# Altium PCB 606-100861-r02.pcbdoc (part 2 of 3)
Units mm, origin at the board's own origin, x right, y up, seen from the top; angles counter-clockwise.
Board outline 64 x 17.5 mm, 4 copper layers (Top Layer, Ground, Power, Bottom Layer), stack 1.551 mm thick; 99 components, 69 nets, 422 pads, 178 vias.
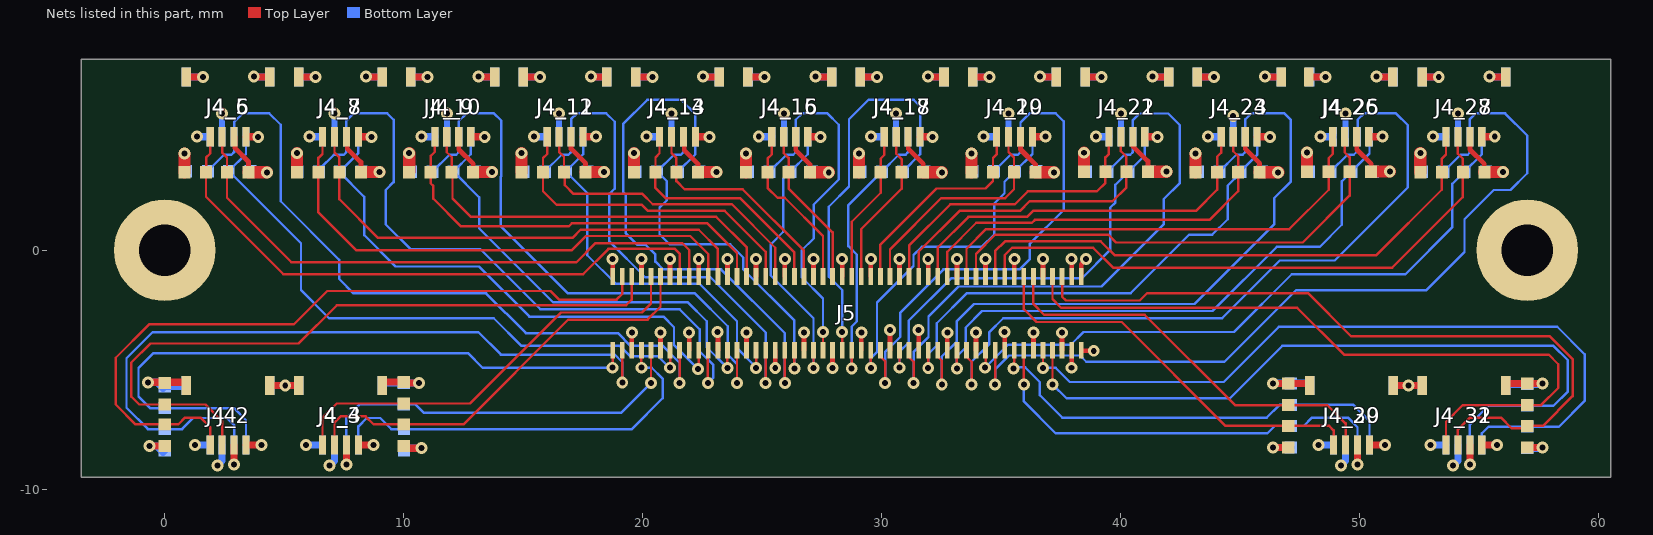
[diagram p4: the nets of this part, all layers, seen from the top]

## Part data
J4 J4_2 J4_3 J4_4 J4_5 J4_6 J4_7 J4_8 J4_9 J4_10 J4_11 J4_12 J4_13 J4_14 J4_15 J4_16 J4_17 J4_18 J4_19 J4_20 J4_21 J4_22 J4_23 J4_24 J4_25 J4_26 J4_27 J4_28 J4_29 J4_30 J4_31 J4_32: "CONN FFC FPC 4POS 0.50MM R/A"
J5: library part DF40HC(3.0)-100DS-0.4V(51), "CONN RCPT 100POS 0.4MM SMD GOLD 3.0MM"
M1 M2: "MTG, 4.25mm PAD, 2.15mm Plated Hole"
R1_1 R1_2 R1_3 R1_4 R1_5 R1_6 R1_7 R1_8 R1_9 R1_10 R1_11 R1_12 R1_13 R1_14 R1_15 R1_16 R1_17 R1_18 R1_19 R1_20 R1_21 R1_22 R1_23 R1_24 R1_25 R1_26 R1_27 R1_28 R1_29 R1_30 R1_31 R1_32 R2_1 R2_2 R2_3 R2_4 R2_5 R2_6 R2_7 R2_8 R2_9 R2_10 R2_11 R2_12 R2_13 R2_14 R2_15 R2_16 R2_17 R2_18 R2_19 R2_20 R2_21 R2_22 R2_23 R2_24 R2_25 R2_26 R2_27 R2_28 R2_29 R2_30 R2_31 R2_32: library part RC0402JR-0710KL, "RES 10.0K OHM 1/16W 5% 0402 SMD"

## Via types
v1: diameter 0.5, hole 0.25, Top Layer to Bottom Layer, tented both sides, 178 vias

## Nets (pads, with @x,y where several pads share a name; then routed paths per layer and width w, separated by ;. In a path a pad name is that pad's centre, name@x,y a point inside that pad or via, vN(x,y) a via of type N, cw(c..) or ccw(c..) an arc to the next point about the centre after c; other vN are vias at no path point)
GND: J4.3 J4.5 J4.6 J4_2.3 J4_2.5 J4_2.6 J4_3.3 J4_3.5 J4_3.6 J4_4.3 J4_4.5 J4_4.6 J4_5.3 J4_5.5 J4_5.6 J4_6.3 J4_6.5 J4_6.6 J4_7.3 J4_7.5 J4_7.6 J4_8.3 J4_8.5 J4_8.6 J4_9.3 J4_9.5 J4_9.6 J4_10.3 J4_10.5 J4_10.6 J4_11.3 J4_11.5 J4_11.6 J4_12.3 J4_12.5 J4_12.6 J4_13.3 J4_13.5 J4_13.6 J4_14.3 J4_14.5 J4_14.6 J4_15.3 J4_15.5 J4_15.6 J4_16.3 J4_16.5 J4_16.6 J4_17.3 J4_17.5 J4_17.6 J4_18.3 J4_18.5 J4_18.6 J4_19.3 J4_19.5 J4_19.6 J4_20.3 J4_20.5 J4_20.6 J4_21.3 J4_21.5 J4_21.6 J4_22.3 J4_22.5 J4_22.6 J4_23.3 J4_23.5 J4_23.6 J4_24.3 J4_24.5 J4_24.6 J4_25.3 J4_25.5 J4_25.6 J4_26.3 J4_26.5 J4_26.6 J4_27.3 J4_27.5 J4_27.6 J4_28.3 J4_28.5 J4_28.6 J4_29.3 J4_29.5 J4_29.6 J4_30.3 J4_30.5 J4_30.6 J4_31.3 J4_31.5 J4_31.6 J4_32.3 J4_32.5 J4_32.6 J5.5 J5.11 J5.17 J5.23 J5.29 J5.35 J5.41 J5.47 J5.53 J5.59 J5.65 J5.71 J5.77 J5.83 J5.89 J5.95 J5.97 J5.98 J5.99 J5.100 M1.1 M2.1 R1_1.1 R1_2.1 R1_3.1 R1_4.1 R1_5.1 R1_6.1 R1_7.1 R1_8.1 R1_9.1 R1_10.1 R1_11.1 R1_12.1 R1_13.1 R1_14.1 R1_15.1 R1_16.1 R1_17.1 R1_18.1 R1_19.1 R1_20.1 R1_21.1 R1_22.1 R1_23.1 R1_24.1 R1_25.1 R1_26.1 R1_27.1 R1_28.1 R1_29.1 R1_30.1 R1_31.1 R1_32.1 R2_1.1 R2_2.1 R2_3.1 R2_4.1 R2_5.1 R2_6.1 R2_7.1 R2_8.1 R2_9.1 R2_10.1 R2_11.1 R2_12.1 R2_13.1 R2_14.1 R2_15.1 R2_16.1 R2_17.1 R2_18.1 R2_19.1 R2_20.1 R2_21.1 R2_22.1 R2_23.1 R2_24.1 R2_25.1 R2_26.1 R2_27.1 R2_28.1 R2_29.1 R2_30.1 R2_31.1 R2_32.1 | length 147.7
  Top Layer w0.1: v1(23.115,-3.42) v1@23.14,-3.445 ; J5.99@38.34,-4.18 J5.99@38.362,-4.202
  Top Layer w0.2: J4_6.3@2.936,4.75 2.936,4.282 3.504,3.715 R1_6.1@3.504,3.265 ; J4_8.3@7.636,4.75 7.636,4.257 8.204,3.689 R1_8.1@8.204,3.269 ; J4_10.3@12.3,4.75 12.3,4.218 12.904,3.614 R1_10.1@12.904,3.269 ; J4_12.3@17,4.75 17,4.243 17.604,3.639 R1_12.1@17.604,3.269 ; J5.5@19.54,-4.18 v1(19.54,-3.44) ; J5.11@20.74,-4.18 20.736,-4.176 20.74,-4.172 v1(20.74,-3.44) ; J4_14.3@21.736,4.75 21.736,4.182 22.304,3.614 R1_14.1@22.304,3.269 ; J5.17@21.94,-4.18 v1(21.94,-3.44) ; J5.23@23.14,-4.18 v1@23.14,-3.445 ; J5.29@24.34,-4.18 v1(24.34,-3.44) ; v1(25.54,-4.92) J5.35@25.54,-4.18 ; J4_16.3@26.397,4.75 26.397,4.193 27,3.59 R1_16.1@27,3.265 ; J5.41@26.74,-4.18 v1(26.74,-3.44) ; v1(27.94,-4.92) J5.47@27.94,-4.18 ; J5.53@29.14,-4.18 v1(29.14,-3.44) ; J5.59@30.34,-4.18 v1(30.34,-3.335) ; J4_18.3@31.1,4.75 31.1,4.243 31.729,3.615 R1_18.1@31.729,3.265 ; J5.65@31.54,-4.18 v1(31.54,-3.335) ; J5.71@32.74,-4.18 v1(32.74,-3.448) ; J5.77@33.94,-4.18 v1(33.94,-3.44) ; J5.83@35.14,-4.18 v1(35.14,-3.42) ; J4_20.3@35.8,4.75 35.8,4.218 36.429,3.59 R1_20.1@36.429,3.265 ; J5.89@36.34,-4.18 v1(36.34,-3.44) ; J5.95@37.54,-4.18 v1(37.54,-3.448) ; v1(37.94,-4.912) J5.97@37.94,-4.18 ; J5.98@37.94,-1.1 v1(37.94,-0.368) ; J5.100@38.34,-1.1 38.34,-0.59 38.54,-0.39 v1(38.54,-0.368) ; J5.99@38.362,-4.202 v1(38.865,-4.202) ; J4_22.3@40.5,4.75 40.5,4.361 41.129,3.733 R1_22.1@41.129,3.29 ; J4_24.3@45.2,4.75 45.2,4.243 45.804,3.64 R1_24.1@45.804,3.265 ; J4_26.3@49.866,4.75 49.866,4.218 50.47,3.614 R1_26.1@50.47,3.294 ; J4_28.3@54.6,4.75 54.6,4.218 55.204,3.614 R1_28.1@55.204,3.269
  Top Layer w0.3: v1(-0.7,-5.522) 0.772,-5.522 J4_2.5@0.9,-5.65 ; v1(-0.641,-8.184) -0.266,-8.184 ; J4_6.5@0.9,7.25 v1(1.598,7.25) ; v1(2.9,-8.953) J4_2.3@2.9,-8.15 ; v1(3.724,7.276) 3.75,7.25 J4_6.6@4.4,7.25 ; J4_2.6@4.4,-5.65 v1(5.041,-5.65) J4_4.5@5.6,-5.65 ; J4_8.5@5.6,7.25 v1(6.298,7.25) ; v1(7.6,-8.953) J4_4.3@7.6,-8.15 ; v1(8.424,7.276) 8.45,7.25 J4_8.6@9.1,7.25 ; J4_4.6@9.1,-5.65 9.244,-5.506 R2_4.1@9.997,-5.506 10.038,-5.547 v1(10.638,-5.547) ; R1_4.1@9.997,-8.184 10.091,-8.278 v1(10.75,-8.278) ; J4_10.5@10.3,7.25 v1(10.998,7.25) ; v1(13.124,7.276) 13.15,7.25 J4_10.6@13.8,7.25 ; J4_12.5@15,7.25 v1(15.698,7.25) ; v1(17.824,7.276) 17.85,7.25 J4_12.6@18.5,7.25 ; J4_14.5@19.7,7.25 v1(20.398,7.25) ; v1(22.524,7.276) 22.55,7.25 J4_14.6@23.2,7.25 ; J4_16.5@24.397,7.25 v1(25.095,7.25) ; v1(27.221,7.276) 27.247,7.25 J4_16.6@27.897,7.25 ; J4_18.5@29.1,7.25 v1(29.798,7.25) ; v1(31.924,7.276) 31.95,7.25 J4_18.6@32.6,7.25 ; J4_20.5@33.8,7.25 v1(34.498,7.25) ; v1(36.624,7.276) 36.65,7.25 J4_20.6@37.3,7.25 ; J4_22.5@38.5,7.25 v1(39.198,7.25) ; v1(41.324,7.276) 41.35,7.25 J4_22.6@42,7.25 ; J4_24.5@43.2,7.25 v1(43.898,7.25) ; v1(46.024,7.276) 46.05,7.25 J4_24.6@46.7,7.25 ; v1(46.359,-8.247) R2_30.1@47,-8.247 ; v1(46.359,-5.578) R1_30.1@47,-5.578 47.828,-5.578 J4_30.5@47.9,-5.65 ; J4_26.5@47.866,7.25 v1(48.564,7.25) ; v1(49.9,-8.953) J4_30.3@49.9,-8.15 ; v1(50.69,7.276) 50.717,7.25 J4_26.6@51.366,7.25 ; J4_30.6@51.4,-5.65 v1(52.041,-5.65) J4_32.5@52.6,-5.65 ; J4_28.5@52.6,7.25 v1(53.298,7.25) ; v1(54.6,-8.953) J4_32.3@54.6,-8.15 ; v1(55.424,7.276) 55.45,7.25 J4_28.6@56.1,7.25 ; J4_32.6@56.102,-5.721 56.246,-5.578 R2_32.1@57,-5.578 v1(57.641,-5.578) ; R1_32.1@57,-8.247 v1(57.641,-8.247)
  Top Layer w0.508: R2_6.1@0.826,3.265 v1(0.826,4.057) ; R1_6.1@3.504,3.265 v1(4.282,3.265) ; R2_8.1@5.526,3.269 v1(5.526,4.061) ; R1_8.1@8.204,3.269 v1(8.982,3.269) ; R2_10.1@10.226,3.269 v1(10.226,4.061) ; R1_10.1@12.904,3.269 v1(13.682,3.269) ; R2_12.1@14.926,3.269 v1(14.926,4.061) ; R1_12.1@17.604,3.269 v1(18.382,3.269) ; R2_14.1@19.626,3.269 v1(19.626,4.061) ; R1_14.1@22.304,3.269 v1(23.082,3.269) ; R2_16.1@24.322,3.265 v1(24.322,4.057) ; R1_16.1@27,3.265 v1(27.778,3.265) ; R2_18.1@29.051,3.265 v1(29.051,4.057) ; R1_18.1@31.729,3.265 v1(32.507,3.265) ; R2_20.1@33.751,3.265 v1(33.751,4.057) ; R1_20.1@36.429,3.265 v1(37.207,3.265) ; R2_22.1@38.451,3.29 v1(38.451,4.082) ; R1_22.1@41.129,3.29 v1(41.907,3.29) ; R2_24.1@43.126,3.265 v1(43.126,4.057) ; R1_24.1@45.804,3.265 v1(46.582,3.265) ; R2_26.1@47.792,3.294 v1(47.792,4.086) ; R1_26.1@50.47,3.294 v1(51.248,3.294) ; R2_28.1@52.526,3.269 v1(52.526,4.061) ; R1_28.1@55.204,3.269 v1(55.982,3.269)
  Bottom Layer w0.1: R1_1.1@-0.072,-8.45 R1_1.1@0,-8.378 ; R2_1.1@-0.072,-5.772 R2_1.1@0,-5.7 ; J4.6@0.85,-5.7 J4.6@0.9,-5.65 ; J4_3.5@9.15,-5.7 J4_3.5@9.1,-5.65 J4_3.5@9.2,-5.55 ; R1_3.1@10,-5.55 R1_3.1@10.003,-5.547 ; R2_3.1@10.008,-8.378 R2_3.1@10.108,-8.278 ; v1(46.359,-8.247) 46.362,-8.25 v1@46.364,-8.252 ; v1(46.359,-5.578) v1@46.372,-5.564 ; J4_29.6@47.814,-5.564 J4_29.6@47.9,-5.65 ; J4_31.5@56.1,-5.65 J4_31.5@56.149,-5.6 ; v1@57.61,-8.278 v1(57.641,-8.247) ; v1@57.618,-5.6 v1(57.641,-5.578)
  Bottom Layer w0.254: J4_5.3@2.4,4.75 v1(2.4,5.722) ; J4_7.3@7.1,4.75 v1(7.1,5.722) ; J4_9.3@11.8,4.75 v1(11.8,5.722) ; J4_11.3@16.5,4.75 v1(16.5,5.722) ; J4_13.3@21.2,4.75 v1(21.2,5.722) ; J4_15.3@25.9,4.75 v1(25.9,5.722) ; J4_17.3@30.6,4.75 v1(30.6,5.722) ; J4_19.3@35.3,4.75 v1(35.3,5.722) ; J4_21.3@40,4.75 v1(40,5.722) ; J4_23.3@44.7,4.644 v1(44.7,5.616) ; J4_25.3@49.4,4.75 v1(49.4,5.722) ; J4_27.3@54.1,4.75 v1(54.1,5.722)
  Bottom Layer w0.3: v1(-0.7,-5.522) -0.322,-5.522 R2_1.1@-0.072,-5.772 ; v1(-0.641,-8.184) -0.338,-8.184 R1_1.1@-0.072,-8.45 ; R1_1.1@-0.061,-8.316 R1_1.1@0,-8.378 ; R2_1.1@0,-5.7 J4.6@0.85,-5.7 ; v1(0.826,4.057) 0.9,3.983 R1_5.1@0.9,3.315 ; J4_5.6@0.9,7.25 v1(1.598,7.25) ; v1(2.2,-9) 2.4,-8.8 J4.3@2.4,-8.15 ; R2_5.1@3.578,3.315 3.628,3.265 v1(4.282,3.265) ; v1(3.724,7.276) 3.75,7.25 J4_5.5@4.4,7.25 ; J4.5@4.4,-5.65 v1(5.041,-5.65) J4_3.6@5.6,-5.65 ; v1(5.526,4.061) 5.526,3.318 R1_7.1@5.55,3.294 ; J4_7.6@5.6,7.25 v1(6.298,7.25) ; v1(6.9,-9) 7.1,-8.8 J4_3.3@7.1,-8.15 ; R2_7.1@8.228,3.294 8.253,3.269 v1(8.982,3.269) ; v1(8.424,7.276) 8.45,7.25 J4_7.5@9.1,7.25 ; J4_3.5@9.2,-5.55 R1_3.1@10,-5.55 ; R1_3.1@10.003,-5.547 v1(10.638,-5.547) ; R2_3.1@10.108,-8.278 v1(10.75,-8.278) ; v1(10.226,4.061) 10.226,3.368 R1_9.1@10.3,3.294 ; J4_9.6@10.3,7.25 v1(10.998,7.25) ; R2_9.1@12.978,3.294 13.003,3.269 v1(13.682,3.269) ; v1(13.124,7.276) 13.15,7.25 J4_9.5@13.8,7.25 ; v1(14.926,4.061) 14.926,3.368 R1_11.1@15,3.294 ; J4_11.6@15,7.25 v1(15.698,7.25) ; R2_11.1@17.678,3.294 17.703,3.269 v1(18.382,3.269) ; v1(17.824,7.276) 17.85,7.25 J4_11.5@18.5,7.25 ; v1(19.626,4.061) 19.626,3.368 R1_13.1@19.7,3.294 ; J4_13.6@19.7,7.25 v1(20.398,7.25) ; R2_13.1@22.378,3.294 22.403,3.269 v1(23.082,3.269) ; v1(22.524,7.276) 22.55,7.25 J4_13.5@23.2,7.25 ; v1(24.322,4.057) 24.322,3.372 R1_15.1@24.4,3.294 ; J4_15.6@24.4,7.25 v1(25.095,7.25) ; R2_15.1@27.078,3.294 27.108,3.265 v1(27.778,3.265) ; v1(27.221,7.276) 27.247,7.25 J4_15.5@27.9,7.25 ; v1(29.051,4.057) 29.051,3.343 R1_17.1@29.1,3.294 ; J4_17.6@29.1,7.25 v1(29.798,7.25) ; R2_17.1@31.778,3.294 31.808,3.265 v1(32.507,3.265) ; v1(31.924,7.276) 31.95,7.25 J4_17.5@32.6,7.25 ; v1(33.751,4.057) 33.751,3.364 R1_19.1@33.8,3.315 ; J4_19.6@33.8,7.25 v1(34.498,7.25) ; R2_19.1@36.478,3.315 36.528,3.265 v1(37.207,3.265) ; v1(36.624,7.276) 36.65,7.25 J4_19.5@37.3,7.25 ; v1(38.451,4.082) 38.451,3.393 R1_21.1@38.55,3.294 ; J4_21.6@38.5,7.25 v1(39.198,7.25) ; R2_21.1@41.228,3.294 41.232,3.29 v1(41.907,3.29) ; v1(41.324,7.276) 41.35,7.25 J4_21.5@42,7.25 ; v1(43.126,4.057) 43.126,3.39 R1_23.1@43.222,3.294 ; J4_23.6@43.2,7.25 v1(43.898,7.25) ; R2_23.1@45.9,3.294 45.929,3.265 v1(46.582,3.265) ; v1(46.024,7.276) 46.05,7.25 J4_23.5@46.7,7.25 ; v1@46.362,-8.25 R1_29.1@47.105,-8.25 ; v1@46.372,-5.564 R2_29.1@47.105,-5.564 J4_29.6@47.814,-5.564 ; v1(47.792,4.086) 47.792,3.374 R1_25.1@47.872,3.294 ; J4_25.6@47.9,7.25 v1(48.564,7.25) ; v1(49.2,-9) 49.4,-8.8 J4_29.3@49.4,-8.15 ; R2_25.1@50.55,3.294 v1(51.248,3.294) ; v1(50.69,7.276) 50.717,7.25 J4_25.5@51.366,7.25 ; J4_29.5@51.4,-5.65 v1(52.041,-5.65) J4_31.6@52.6,-5.65 ; v1(52.526,4.061) 52.526,3.372 R1_27.1@52.604,3.294 ; J4_27.6@52.6,7.25 v1(53.298,7.25) ; v1(53.9,-9) 54.1,-8.8 J4_31.3@54.1,-8.15 ; R2_27.1@55.282,3.294 55.307,3.269 v1(55.982,3.269) ; v1(55.424,7.276) 55.45,7.25 J4_27.5@56.1,7.25 ; J4_31.5@56.149,-5.6 R1_31.1@57,-5.6 v1@57.618,-5.6 ; R2_31.1@57,-8.278 v1@57.61,-8.278
SENSOR_A1: J4.1 J5.1 R2_1.2 | length 28.2
  Top Layer w0.1: v1(18.74,-4.912) J5.1@18.74,-4.18
  Bottom Layer w0.1: J4.1@3.4,-8.15 3.4,-7.108 2.892,-6.6 R2_1.2@0,-6.6 -0.615,-6.6 -1.1,-6.115 -1.1,-4.924 -0.476,-4.3 12.686,-4.3 13.298,-4.912 v1(18.74,-4.912)
SENSOR_A2: J4_2.1 J5.4 R2_2.2 | length 30.6
  Top Layer w0.1: J4_2.1@1.9,-8.15 1.9,-7.4 1.5,-7 0.847,-7 0.563,-7.284 R2_2.2@0,-7.284 -1.219,-7.284 -2.053,-6.45 -2.053,-4.493 -0.66,-3.1 5.4,-3.1 6.8,-1.7 16.14,-1.7 16.5,-2.06 18.904,-2.06 19.14,-1.824 J5.4@19.14,-1.1
SENSOR_A3: J4_3.1 J5.7 R2_3.2 | length 17
  Top Layer w0.1: v1(19.94,-4.912) J5.7@19.94,-4.18
  Bottom Layer w0.1: J4_3.1@8.1,-8.15 8.1,-7.367 8.45,-7.017 9.017,-7.017 9.478,-7.478 R2_3.2@10.008,-7.478 13.583,-7.478 ; 13.586,-7.476 13.583,-7.478 ; v1(19.94,-4.912) 20.374,-4.912 20.827,-5.365 20.827,-6.192 19.541,-7.478 13.583,-7.478
SENSOR_A4: J4_4.1 J5.10 R2_4.2 | length 18
  Top Layer w0.1: J4_4.1@6.6,-8.15 6.6,-7 7.194,-6.406 R2_4.2@9.997,-6.406 12.774,-6.406 16.58,-2.6 19.965,-2.6 20.34,-2.225 J5.10@20.34,-1.1
SENSOR_A5: J4_5.1 J5.13 R2_5.2 | length 25.5
  Top Layer w0.1: v1(21.14,-4.912) J5.13@21.14,-4.18
  Bottom Layer w0.1: J4_5.1@3.4,4.75 3.4,4.036 R2_5.2@2.678,3.315 5.7,0.293 5.7,-1.663 6.877,-2.84 13.765,-2.84 14.925,-4 19.04,-4 19.465,-4.425 20.625,-4.425 21.112,-4.912 v1(21.14,-4.912) v1@21.112,-4.94
SENSOR_A6: J4_6.1 J5.16 R2_6.2 | length 25.2
  Top Layer w0.1: J4_6.1@1.9,4.75 1.9,4.05 1.729,3.879 1.729,3.268 R2_6.2@1.726,3.265 1.726,2.238 4.964,-1 17.5,-1 18.56,0.06 21.34,0.06 21.54,-0.14 J5.16@21.54,-1.1
SENSOR_A7: J4_7.1 J5.19 R2_7.2 | length 22.4
  Top Layer w0.1: v1(22.315,-4.965) 22.34,-4.94 J5.19@22.34,-4.18
  Bottom Layer w0.1: J4_7.1@8.1,4.75 8.1,4.066 R2_7.2@7.328,3.294 7.308,3.274 8.347,2.235 8.347,0.636 9.658,-0.675 13.154,-0.675 15.253,-2.775 20.864,-2.775 21.306,-3.217 21.306,-3.956 v1(22.315,-4.965)
SENSOR_A8: J4_8.1 J5.22 R2_8.2 | length 21.7
  Top Layer w0.1: J4_8.1@6.6,4.75 6.6,4.036 6.429,3.865 6.429,3.272 R2_8.2@6.426,3.269 6.426,1.584 8,0.01 17.036,0.01 17.626,0.6 21.986,0.6 22.74,-0.154 J5.22@22.74,-1.1
SENSOR_A9: J4_9.1 J5.25 R2_9.2 | length 18.8
  Top Layer w0.1: v1(23.54,-4.92) J5.25@23.54,-4.18
  Bottom Layer w0.1: J4_9.1@12.8,4.75 12.8,4.016 R2_9.2@12.078,3.294 13.15,2.222 13.15,0.925 16.252,-2.177 21.887,-2.177 22.675,-2.964 22.675,-4.055 v1(23.54,-4.92)
SENSOR_A10: J4_10.1 J5.28 R2_10.2 | length 17.4
  Top Layer w0.1: J4_10.1@11.3,4.75 11.3,4.125 11.126,3.951 R2_10.2@11.126,3.269 11.126,2.8 11.24,2.686 11.24,2.16 12.4,1 16.9,1 17.025,1.125 22.7,1.125 23.94,-0.115 J5.28@23.94,-1.1
SENSOR_A11: J4_11.1 J5.31 R2_11.2 | length 16.1
  Top Layer w0.1: v1(24.74,-4.92) J5.31@24.74,-4.18
  Bottom Layer w0.1: J4_11.1@17.5,4.75 17.5,4.016 R2_11.2@16.778,3.294 17.678,2.394 17.678,-0.203 18.875,-1.4 22.375,-1.4 23.94,-2.965 23.94,-4.09 24.74,-4.89 v1(24.74,-4.92)
SENSOR_A12: J4_12.1 J5.34 R2_12.2 | length 13.7
  Top Layer w0.1: J4_12.1@16,4.75 16,4.036 15.826,3.862 R2_12.2@15.826,3.269 15.826,2.474 16.4,1.9 19.96,1.9 20.21,1.65 23.425,1.65 25.14,-0.065 J5.34@25.14,-1.1
SENSOR_A13: J4_13.1 J5.37 R2_13.2 | length 23
  Top Layer w0.1: v1(25.94,-5.557) J5.37@25.94,-4.18
  Bottom Layer w0.1: R2_13.2@21.478,3.294 22.2,4.016 J4_13.1@22.2,4.75 22.2,5.7 21.598,6.302 20.191,6.302 19.175,5.286 19.175,2.433 19.29,2.318 19.29,0.71 19.775,0.225 20.125,0.225 20.525,-0.175 20.525,-0.473 20.852,-0.8 23.275,-0.8 25.94,-3.465 v1(25.94,-5.557)
SENSOR_A14: J4_14.1 J5.40 R2_14.2 | length 10.2
  Top Layer w0.1: R2_14.2@20.526,3.269 20.526,2.61 20.952,2.184 24.066,2.184 26.34,-0.09 J5.40@26.34,-1.1 ; R2_14.2@20.529,3.272 20.529,3.89 20.7,4.061 J4_14.1@20.7,4.75
SENSOR_A15: J4_15.1 J5.43 R2_15.2 | length 11.8
  Top Layer w0.1: v1(27.14,-4.92) J5.43@27.14,-4.18
  Bottom Layer w0.1: J4_15.1@26.9,4.75 26.9,4.016 R2_15.2@26.178,3.294 25.878,2.994 25.878,0.778 25.35,0.25 25.35,-1.05 27.14,-2.84 v1(27.14,-4.92)
SENSOR_A16: J4_16.1 J5.46 R2_16.2 | length 7.1
  Top Layer w0.1: J4_16.1@25.397,4.75 25.397,4.011 25.222,3.837 R2_16.2@25.222,3.265 25.222,2.613 25.636,2.2 25.94,2.2 27.54,0.6 J5.46@27.54,-1.1
SENSOR_A17: J4_17.1 J5.49 R2_17.2 | length 16.7
  Top Layer w0.1: J5.49@28.34,-4.18 v1(28.34,-3.42)
  Bottom Layer w0.1: v1(28.34,-3.42) 28.34,-1.663 27.778,-1.101 27.778,1.825 28.625,2.672 28.625,5.485 29.442,6.302 31.328,6.302 31.6,6.03 J4_17.1@31.6,4.75 31.6,4.016 R2_17.2@30.878,3.294
SENSOR_A18: J4_18.1 J5.52 R2_18.2 | length 6.4
  Top Layer w0.1: J5.52@28.74,-1.1 28.74,1.197 29.951,2.408 R2_18.2@29.951,3.265 29.951,3.837 30.1,3.986 J4_18.1@30.1,4.75
SENSOR_A19: J4_19.1 J5.55 R2_19.2 | length 14.7
  Top Layer w0.1: v1(29.54,-4.92) J5.55@29.54,-4.18
  Bottom Layer w0.1: v1(29.54,-4.92) 29.54,-4.508 29.798,-4.25 29.798,-2.177 31.325,-0.65 31.325,-0.2 31.675,0.15 34.175,0.15 34.7,0.675 34.7,1.958 35.129,2.387 35.129,2.865 R2_19.2@35.578,3.315 36.3,4.036 J4_19.1@36.3,4.75
SENSOR_A20: J4_20.1 J5.58 R2_20.2 | length 9.1
  Top Layer w0.1: J5.58@29.94,-1.1 29.94,0.24 32.284,2.584 34.335,2.584 34.651,2.9 R2_20.2@34.651,3.265 34.651,3.862 34.8,4.011 J4_20.1@34.8,4.75
SENSOR_A21: J4_21.1 J5.61 R2_21.2 | length 17.9
  Top Layer w0.1: v1(30.74,-4.912) J5.61@30.74,-4.18
  Bottom Layer w0.1: v1(30.74,-4.912) 30.74,-4.24 31.125,-3.855 31.125,-2.943 32.893,-1.175 38.365,-1.175 39.55,0.01 39.55,1.782 39.768,2 39.768,2.74 40.322,3.294 R2_21.2@40.328,3.294 41,3.966 J4_21.1@41,4.75
SENSOR_A22: J4_22.1 J5.64 R2_22.2 | length 12.6
  Top Layer w0.1: J5.64@31.14,-1.1 31.14,0.2 32.865,1.925 35.565,1.925 36.111,2.471 39,2.471 39.351,2.822 R2_22.2@39.351,3.29 39.351,3.887 39.5,4.036 J4_22.1@39.5,4.75
SENSOR_A23: J4_23.1 J5.67 R2_23.2 | length 20.7
  Top Layer w0.1: v1(31.94,-4.92) J5.67@31.94,-4.18
  Bottom Layer w0.1: v1(31.94,-4.92) 31.94,-4.335 32.297,-3.978 32.297,-3.053 33.56,-1.79 40.41,-1.79 42.85,0.65 43.818,0.65 44.468,1.3 44.468,2.707 45,3.238 R2_23.2@45,3.294 45.7,3.994 J4_23.1@45.7,4.75
SENSOR_A24: J4_24.1 J5.70 R2_24.2 | length 16.2
  Top Layer w0.1: J5.70@32.34,-1.1 32.34,0.121 33.619,1.4 36.075,1.4 36.325,1.65 43.141,1.65 44.026,2.535 R2_24.2@44.026,3.265 44.026,3.912 44.2,4.086 J4_24.1@44.2,4.75
SENSOR_A25: J4_25.1 J5.73 R2_25.2 | length 24.3
  Top Layer w0.1: v1@33.14,-4.93 J5.73@33.14,-4.18 J5.73@33.14,-4.17
  Bottom Layer w0.1: v1(33.14,-4.94) 33.14,-4.435 33.507,-4.068 33.507,-3.229 34.196,-2.54 43.835,-2.54 46.525,0.15 48.323,0.15 49.24,1.067 49.24,2.884 R2_25.2@49.65,3.294 50.4,4.044 J4_25.1@50.4,4.75
SENSOR_A26: J4_26.1 J5.76 R2_26.2 | length 19.6
  Top Layer w0.1: J5.76@33.54,-1.1 33.54,0.063 34.362,0.885 47.044,0.885 48.692,2.533 R2_26.2@48.692,3.294 48.692,3.862 48.866,4.036 J4_26.1@48.866,4.75
SENSOR_A27: J4_27.1 J5.79 R2_27.2 | length 27
  Top Layer w0.1: v1(34.315,-4.912) 34.34,-4.887 J5.79@34.34,-4.18
  Bottom Layer w0.1: v1@34.323,-4.92 v1(34.315,-4.912) 35.277,-3.95 37.9,-3.95 38.432,-3.418 44.729,-3.418 47.146,-1 51.9,-1 53.87,0.97 53.87,2.782 R2_27.2@54.382,3.294 55.1,4.012 J4_27.1@55.1,4.75
SENSOR_A28: J4_28.1 J5.82 R2_28.2 | length 23.6
  Top Layer w0.1: J5.82@34.74,-1.1 34.74,-0.035 35.15,0.375 39.159,0.375 39.734,-0.2 50.691,-0.2 53.426,2.536 R2_28.2@53.426,3.269 ; R2_28.2@53.429,3.272 53.429,3.84 53.6,4.011 J4_28.1@53.6,4.75
SENSOR_A29: J4_29.1 J5.85 R2_29.2 | length 18.4
  Top Layer w0.1: v1(35.515,-4.94) 35.54,-4.915 J5.85@35.54,-4.18
  Bottom Layer w0.1: v1(35.515,-4.94) 35.555,-4.9 36,-4.9 36.607,-5.507 36.607,-6.057 37.55,-7 46.1,-7 46.636,-6.464 R2_29.2@47.105,-6.464 49.728,-6.464 50.4,-7.136 J4_29.1@50.4,-8.15
SENSOR_A30: J4_30.1 J5.88 R2_30.2 | length 17
  Top Layer w0.1: J5.88@35.94,-1.1 35.94,-2.465 36.475,-3 40.035,-3 44.382,-7.347 R2_30.2@47,-7.347 48.714,-7.347 48.9,-7.534 J4_30.1@48.9,-8.15
SENSOR_A31: J4_31.1 J5.91 R2_31.2 | length 32.4
  Top Layer w0.1: v1(36.74,-4.93) J5.91@36.74,-4.18
  Bottom Layer w0.1: v1(36.74,-4.93) 36.75,-4.92 37.273,-4.92 37.86,-5.507 44.301,-5.507 46.608,-3.2 58.252,-3.2 59.4,-4.348 59.4,-6.3 58.322,-7.378 R2_31.2@57,-7.378 55.38,-7.378 55.1,-7.658 J4_31.1@55.1,-8.15
SENSOR_A32: J4_32.1 J5.94 R2_32.2 | length 30.5
  Top Layer w0.1: J5.94@37.14,-1.1 37.14,-2.04 37.5,-2.4 47.372,-2.4 49.336,-4.364 57.899,-4.364 58.3,-4.765 58.3,-5.757 57.58,-6.478 R2_32.2@57,-6.478 54.304,-6.478 53.6,-7.182 J4_32.1@53.6,-8.15
SENSOR_B1: J4.2 J5.3 R1_1.2 | length 32
  Top Layer w0.1: v1(19.14,-5.522) J5.3@19.14,-4.18
  Bottom Layer w0.1: J4.2@2.9,-8.15 2.9,-7.313 2.604,-7.017 1.187,-7.017 0.726,-7.478 R1_1.2@0,-7.478 -0.706,-7.478 -1.6,-6.584 -1.6,-4.515 -0.505,-3.42 13.116,-3.42 14.061,-4.364 18.825,-4.364 19.14,-4.679 v1(19.14,-5.522)
SENSOR_B2: J4_2.2 J5.6 R1_2.2 | length 29.6
  Top Layer w0.1: J4_2.2@2.4,-8.15 2.4,-7.15 1.7,-6.45 R1_2.2@0,-6.45 -1.069,-6.45 -1.4,-6.119 -1.4,-4.7 -0.6,-3.9 5.6,-3.9 7.2,-2.3 19.3,-2.3 19.54,-2.06 J5.6@19.54,-1.1
SENSOR_B3: J4_3.2 J5.9 R1_3.2 | length 16.1
  Top Layer w0.1: v1(20.34,-5.547) J5.9@20.34,-4.18
  Bottom Layer w0.1: J4_3.2@7.6,-8.15 7.6,-7.002 8.152,-6.45 R1_3.2@10,-6.45 10.491,-6.45 10.841,-6.8 19.087,-6.8 v1(20.34,-5.547)
SENSOR_B4: J4_4.2 J5.12 R1_4.2 | length 18.1
  Top Layer w0.1: J4_4.2@7.1,-8.15 7.1,-7.204 7.357,-6.947 8.404,-6.947 8.741,-7.284 R1_4.2@9.997,-7.284 12.495,-7.284 16.879,-2.9 20.198,-2.9 20.74,-2.358 J5.12@20.74,-1.1
SENSOR_B5: J4_5.2 J5.15 R1_5.2 | length 30.4
  Top Layer w0.1: v1(21.54,-5.557) J5.15@21.54,-4.18
  Bottom Layer w0.1: R1_5.2@1.8,3.315 2.486,4 2.793,4 2.9,4.107 J4_5.2@2.9,4.75 2.9,5.364 3.264,5.728 4.373,5.728 4.85,5.251 4.85,2.05 7.3,-0.4 7.3,-1.2 7.9,-1.8 13.445,-1.8 15.11,-3.465 18.955,-3.465 19.49,-4 20.838,-4 21.54,-4.702 v1(21.54,-5.557)
SENSOR_B6: J4_6.2 J5.18 R1_6.2 | length 24.7
  Top Layer w0.1: J4_6.2@2.4,4.75 2.4,4.093 2.604,3.89 R1_6.2@2.604,3.265 2.604,2.196 5.3,-0.5 17.219,-0.5 18.019,0.3 21.65,0.3 21.94,0.01 J5.18@21.94,-1.1
SENSOR_B7: J4_7.2 J5.21 R1_7.2 | length 28.3
  Top Layer w0.1: v1(22.718,-5.557) 22.718,-4.202 J5.21@22.74,-4.18
  Bottom Layer w0.1: R1_7.2@6.5,3.422 7.078,4 7.493,4 7.6,4.107 J4_7.2@7.6,4.75 7.6,5.425 7.903,5.728 9.308,5.728 9.576,5.46 9.576,2.852 9.247,2.522 9.247,1.085 10.282,0.05 13.202,0.05 15.717,-2.465 21.54,-2.465 22.375,-3.3 22.375,-4.225 22.95,-4.8 22.95,-5.324 v1(22.718,-5.557)
SENSOR_B8: J4_8.2 J5.24 R1_8.2 | length 20.8
  Top Layer w0.1: J4_8.2@7.1,4.75 7.1,4.093 7.304,3.889 R1_8.2@7.304,3.269 7.304,2.135 8.918,0.521 17.058,0.521 17.396,0.86 22.34,0.86 23.14,0.06 J5.24@23.14,-1.1
SENSOR_B9: J4_9.2 J5.27 R1_9.2 | length 24.3
  Top Layer w0.1: v1(23.94,-5.547) J5.27@23.94,-4.18
  Bottom Layer w0.1: R1_9.2@11.2,3.294 11.906,4 12.193,4 12.3,4.107 J4_9.2@12.3,4.75 12.3,5.399 12.628,5.728 13.773,5.728 14.082,5.419 14.082,3.103 14.05,3.071 14.05,1.016 16.856,-1.79 22.165,-1.79 23.55,-3.175 23.55,-4.364 23.94,-4.754 v1(23.94,-5.547)
SENSOR_B10: J4_10.2 J5.30 R1_10.2 | length 17.1
  Top Layer w0.1: J4_10.2@11.8,4.75 11.8,4.1 12.004,3.896 R1_10.2@12.004,3.269 12.04,3.233 12.04,2.174 12.814,1.4 23.075,1.4 24.34,0.135 J5.30@24.34,-1.1
SENSOR_B11: J4_11.2 J5.33 R1_11.2 | length 21.6
  Top Layer w0.1: v1(25.14,-5.557) J5.33@25.14,-4.18
  Bottom Layer w0.1: R1_11.2@15.9,3.281 R1_11.2@15.9,3.294 16.606,4 16.893,4 17,4.107 J4_11.2@17,4.75 17,5.488 17.24,5.728 18.473,5.728 18.825,5.376 18.825,2.582 18.603,2.36 18.603,0.372 20.1,-1.125 22.825,-1.125 25.14,-3.44 v1(25.14,-5.557)
SENSOR_B12: J4_12.2 J5.36 R1_12.2 | length 13.2
  Top Layer w0.1: J4_12.2@16.5,4.75 16.5,4.118 16.704,3.915 16.704,3.27 16.74,3.233 16.74,2.72 17.1,2.36 19.98,2.36 20.415,1.925 23.725,1.925 25.54,0.11 J5.36@25.54,-1.1
SENSOR_B13: J4_13.2 J5.39 R1_13.2 | length 15.2
  Top Layer w0.1: v1(26.34,-4.94) J5.39@26.34,-4.18
  Bottom Layer w0.1: J4_13.2@21.7,4.75 21.7,4.107 21.593,4 21.306,4 R1_13.2@20.6,3.294 21,2.894 21,2.085 20.7,1.785 20.7,0.675 21.125,0.25 23.65,0.25 24.2,-0.3 24.2,-0.8 26.34,-2.94 v1(26.34,-4.94)
SENSOR_B14: J4_14.2 J5.42 R1_14.2 | length 9.6
  Top Layer w0.1: J4_14.2@21.2,4.75 21.2,4.068 21.404,3.864 R1_14.2@21.404,3.269 21.404,2.894 21.746,2.552 24.177,2.552 26.74,-0.01 J5.42@26.74,-1.1
SENSOR_B15: J4_15.2 J5.45 R1_15.2 | length 15.3
  Top Layer w0.1: J5.45@27.54,-4.18 v1(27.54,-3.42)
  Bottom Layer w0.1: R1_15.2@25.3,3.294 26.006,4 26.293,4 26.4,4.107 J4_15.2@26.4,4.75 26.4,5.46 26.668,5.728 27.722,5.728 28.2,5.25 28.2,2.965 27.15,1.915 27.15,0.5 26.65,0 26.65,-1.125 27.54,-2.015 v1(27.54,-3.42)
SENSOR_B16: J4_16.2 J5.48 R1_16.2 | length 6.7
  Top Layer w0.1: J4_16.2@25.897,4.75 25.897,4.068 26.1,3.865 R1_16.2@26.1,3.265 26.1,2.591 27.94,0.752 J5.48@27.94,-1.1
SENSOR_B17: J4_17.2 J5.51 R1_17.2 | length 11.9
  Top Layer w0.1: v1(28.74,-4.94) J5.51@28.74,-4.18
  Bottom Layer w0.1: v1(28.74,-4.94) 28.74,-3.185 28.95,-2.975 28.95,-0.175 28.6,0.175 28.6,1.894 R1_17.2@30,3.294 30.706,4 30.993,4 31.1,4.107 J4_17.2@31.1,4.75
SENSOR_B18: J4_18.2 J5.54 R1_18.2 | length 6.6
  Top Layer w0.1: J5.54@29.14,-1.1 29.14,0.885 30.829,2.574 R1_18.2@30.829,3.265 30.829,3.815 30.6,4.043 J4_18.2@30.6,4.75
SENSOR_B19: J4_19.2 J5.57 R1_19.2 | length 22.1
  Top Layer w0.1: J5.57@29.94,-4.18 29.94,-4.449 30.14,-4.649 30.14,-5.543 v1(30.136,-5.547)
  Bottom Layer w0.1: v1(30.136,-5.547) 30.136,-4.256 30.775,-3.618 30.775,-2.6 32.575,-0.8 35.764,-0.8 36.183,-0.382 36.183,0.268 37.607,1.692 37.607,5.394 37.273,5.728 36.183,5.728 35.8,5.345 J4_19.2@35.8,4.75 35.8,4.107 35.693,4 35.386,4 R1_19.2@34.7,3.315
SENSOR_B20: J4_20.2 J5.60 R1_20.2 | length 9.7
  Top Layer w0.1: J5.60@30.34,-1.1 30.34,0.04 32.484,2.184 35.16,2.184 35.529,2.552 R1_20.2@35.529,3.265 35.529,3.89 35.3,4.118 J4_20.2@35.3,4.75
SENSOR_B21: J4_21.2 J5.63 R1_21.2 | length 25.4
  Top Layer w0.1: J5.63@31.14,-4.18 31.14,-4.476 31.328,-4.664 v1(31.328,-5.557)
  Bottom Layer w0.1: v1(31.328,-5.557) 31.328,-4.252 31.95,-3.63 31.95,-2.775 33.213,-1.512 39.189,-1.512 41.786,1.085 41.786,2.136 42.469,2.819 42.469,5.232 41.979,5.722 40.772,5.722 40.5,5.45 J4_21.2@40.5,4.75 40.5,4.107 40.393,4 40.156,4 R1_21.2@39.45,3.294
SENSOR_B22: J4_22.2 J5.66 R1_22.2 | length 13.1
  Top Layer w0.1: J5.66@31.54,-1.1 31.54,-0.06 33.25,1.65 35.775,1.65 36.175,2.05 39.644,2.05 40.229,2.635 R1_22.2@40.229,3.29 40.229,3.915 40,4.143 J4_22.2@40,4.75
SENSOR_B23: J4_23.2 J5.69 R1_23.2 | length 28.9
  Top Layer w0.1: J5.69@32.34,-4.18 32.34,-4.442 32.507,-4.609 v1(32.507,-5.608)
  Bottom Layer w0.1: v1(32.507,-5.608) 32.507,-4.443 33.14,-3.81 33.14,-2.96 33.855,-2.245 43.078,-2.245 46.408,1.085 46.408,2.178 47.112,2.882 47.112,5.456 46.84,5.728 45.45,5.728 45.2,5.478 J4_23.2@45.2,4.75 45.2,4.107 45.093,4 44.828,4 R1_23.2@44.122,3.294
SENSOR_B24: J4_24.2 J5.72 R1_24.2 | length 16.6
  Top Layer w0.1: J5.72@32.74,-1.1 32.74,-0.06 33.95,1.15 36.275,1.15 36.4,1.275 43.707,1.275 44.904,2.471 R1_24.2@44.904,3.265 44.904,3.94 44.7,4.143 J4_24.2@44.7,4.75
SENSOR_B25: J4_25.2 J5.75 R1_25.2 | length 31.8
  Top Layer w0.1: J5.75@33.54,-4.18 33.54,-4.45 33.754,-4.664 v1(33.754,-5.612)
  Bottom Layer w0.1: v1(33.754,-5.612) 33.754,-4.664 34.498,-3.919 34.498,-3.418 35.076,-2.84 44.234,-2.84 46.649,-0.425 48.948,-0.425 52,2.627 52,5.238 51.51,5.728 50.17,5.728 49.902,5.46 49.902,4.753 J4_25.2@49.9,4.75 49.9,4.157 49.743,4 49.478,4 R1_25.2@48.772,3.294
SENSOR_B26: J4_26.2 J5.78 R1_26.2 | length 20.4
  Top Layer w0.1: J5.78@33.94,-1.1 33.94,-0.15 34.74,0.65 39.475,0.65 39.8,0.325 47.605,0.325 49.57,2.29 R1_26.2@49.57,3.294 49.57,3.889 49.366,4.093 J4_26.2@49.366,4.75
SENSOR_B27: J4_27.2 J5.81 R1_27.2 | length 36
  Top Layer w0.1: v1(34.74,-5.608) J5.81@34.74,-4.18
  Bottom Layer w0.1: v1(34.74,-5.608) 34.74,-4.98 35.321,-4.399 38.285,-4.399 38.55,-4.664 44.336,-4.664 47.337,-1.663 52.779,-1.663 54.375,-0.067 54.375,1.3 55.6,2.525 56.3,2.525 57,3.225 57,4.801 56.073,5.728 54.838,5.728 54.6,5.49 J4_27.2@54.6,4.75 54.6,4.086 54.513,4 54.21,4 R1_27.2@53.504,3.294
SENSOR_B28: J4_28.2 J5.84 R1_28.2 | length 24.4
  Top Layer w0.1: J5.84@35.14,-1.1 35.14,-0.2 35.45,0.11 38.84,0.11 39.675,-0.725 51.355,-0.725 54.304,2.224 R1_28.2@54.304,3.269 54.304,3.839 54.1,4.043 J4_28.2@54.1,4.75
SENSOR_B29: J4_29.2 J5.87 R1_29.2 | length 17.8
  Top Layer w0.1: v1(35.94,-5.608) J5.87@35.94,-4.18
  Bottom Layer w0.1: v1(35.94,-5.608) 35.94,-6.325 37.273,-7.658 46.126,-7.658 46.434,-7.35 R1_29.2@47.105,-7.35 47.65,-7.35 48,-7 49.5,-7 49.9,-7.4 J4_29.2@49.9,-8.15
SENSOR_B30: J4_30.2 J5.90 R1_30.2 | length 17.3
  Top Layer w0.1: J5.90@36.34,-1.1 36.34,-2.245 36.795,-2.7 41,-2.7 44.778,-6.478 R1_30.2@47,-6.478 R1_30.2@47.053,-6.478 ; R1_30.2@47,-6.425 R1_30.2@47.053,-6.478 ; J4_30.2@49.4,-8.15 49.4,-7.242 48.636,-6.478 R1_30.2@47.053,-6.478
SENSOR_B31: J4_31.2 J5.93 R1_31.2 | length 31.3
  Top Layer w0.1: v1(37.14,-5.608) J5.93@37.14,-4.18
  Bottom Layer w0.1: v1(37.14,-5.608) 37.724,-6.192 44.558,-6.192 46.75,-4 58.1,-4 58.7,-4.6 58.7,-5.9 58.1,-6.5 R1_31.2@57,-6.5 55.381,-6.5 54.6,-7.282 J4_31.2@54.6,-8.15 ; R1_31.2@57,-6.598 R1_31.2@57.039,-6.598
SENSOR_B32: J4_32.2 J5.96 R1_32.2 | length 31.5
  Top Layer w0.1: J5.96@37.54,-1.1 37.54,-1.94 37.7,-2.1 40.79,-2.1 41.1,-1.79 47.828,-1.79 49.638,-3.6 57.952,-3.6 58.9,-4.548 58.9,-6.1 57.653,-7.347 R1_32.2@57,-7.347 56.898,-7.449 56.35,-7.449 55.901,-7 54.6,-7 54.1,-7.5 J4_32.2@54.1,-8.15
SENSOR_VCC1: J4.4 J4_2.4 J4_3.4 J4_4.4 J4_5.4 J4_6.4 J4_7.4 J4_8.4 J5.2 J5.8 J5.14 J5.20 | length 7.7
  Top Layer w0.2: J5.2@18.74,-1.1 v1(18.74,-0.368) ; J5.8@19.94,-1.1 v1(19.94,-0.368) ; J5.14@21.14,-1.1 v1(21.14,-0.368) ; J5.20@22.34,-1.1 v1(22.34,-0.368)
  Top Layer w0.3: J4_2.4@3.4,-8.15 v1(4.041,-8.15) ; J4_6.4@3.4,4.75 v1(3.91,4.75) ; J4_4.4@8.1,-8.15 v1(8.741,-8.15) ; J4_8.4@8.1,4.75 v1(8.64,4.75)
  Bottom Layer w0.3: v1(1.259,-8.15) J4.4@1.9,-8.15 ; v1(1.35,4.76) 1.36,4.75 J4_5.4@1.9,4.75 ; v1(5.9,-8.15) J4_3.4@6.6,-8.15 ; v1@6.064,4.75 J4_7.4@6.6,4.75
  other v1: 6.05,4.76
SENSOR_VCC2: J4_9.4 J4_10.4 J4_11.4 J4_12.4 J4_13.4 J4_14.4 J4_15.4 J4_16.4 J5.26 J5.32 J5.38 J5.44 | length 7.3
  Top Layer w0.2: J5.26@23.54,-1.1 v1(23.54,-0.368) ; J5.32@24.74,-1.1 v1(24.74,-0.368) ; J5.38@25.94,-1.1 v1(25.94,-0.368) ; J5.44@27.14,-1.1 v1(27.14,-0.368)
  Top Layer w0.3: J4_10.4@12.8,4.75 v1(13.386,4.75) ; J4_12.4@17.5,4.75 18.03,4.75 v1(18.04,4.76) ; J4_14.4@22.2,4.75 v1(22.786,4.75) ; J4_16.4@26.897,4.75 v1(27.44,4.75)
  Bottom Layer w0.3: v1@10.764,4.75 J4_9.4@11.3,4.75 ; v1@15.464,4.75 J4_11.4@16,4.75 ; v1@20.164,4.75 J4_13.4@20.7,4.75 ; v1@24.864,4.75 J4_15.4@25.4,4.75
  other v1: 10.75,4.76 15.45,4.76 20.15,4.76 24.85,4.76
SENSOR_VCC3: J4_17.4 J4_18.4 J4_19.4 J4_20.4 J4_21.4 J4_22.4 J4_23.4 J4_24.4 J5.50 J5.56 J5.62 J5.68 | length 7.2
  Top Layer w0.2: J5.50@28.34,-1.1 v1(28.34,-0.368) ; J5.56@29.54,-1.1 v1(29.54,-0.368) ; J5.62@30.74,-1.1 v1(30.74,-0.368) ; J5.68@31.94,-1.1 v1(31.94,-0.368)
  Top Layer w0.3: J4_18.4@31.6,4.75 v1(32.122,4.75) ; J4_20.4@36.3,4.75 36.83,4.75 v1(36.84,4.76) ; J4_22.4@41,4.75 v1(41.54,4.75) ; J4_24.4@45.7,4.75 v1(46.24,4.75)
  Bottom Layer w0.3: v1@29.564,4.75 J4_17.4@30.1,4.75 ; v1@34.264,4.75 J4_19.4@34.8,4.75 ; v1@38.964,4.75 J4_21.4@39.5,4.75 ; v1@43.664,4.75 J4_23.4@44.2,4.75
  other v1: 29.55,4.76 34.25,4.76 38.95,4.76 43.65,4.76
SENSOR_VCC4: J4_25.4 J4_26.4 J4_27.4 J4_28.4 J4_29.4 J4_30.4 J4_31.4 J4_32.4 J5.74 J5.80 J5.86 J5.92 | length 7.7
  Top Layer w0.2: J5.74@33.14,-1.1 v1(33.14,-0.368) ; J5.80@34.34,-1.1 v1(34.34,-0.368) ; J5.86@35.54,-1.1 v1(35.54,-0.368) ; J5.92@36.74,-1.1 v1(36.74,-0.368)
  Top Layer w0.3: J4_26.4@50.366,4.75 50.93,4.75 v1(50.94,4.76) ; J4_30.4@50.4,-8.15 v1(51.041,-8.15) ; J4_32.4@55.1,-8.15 v1(55.741,-8.15) ; J4_28.4@55.1,4.75 55.63,4.75 v1(55.64,4.76)
  Bottom Layer w0.1: v1(53.05,4.76) 53.054,4.76 v1@53.064,4.75
  Bottom Layer w0.3: v1(48.259,-8.15) J4_29.4@48.9,-8.15 ; v1@48.364,4.75 J4_25.4@48.9,4.75 ; v1(52.959,-8.15) J4_31.4@53.6,-8.15 ; v1@53.064,4.75 J4_27.4@53.6,4.75
  other v1: 48.35,4.76

## Polygon pours and split planes (outlines as drawn)
no net on FAB_DWG (solid): 82 vertices, not listed, extent 358.174,-123.906 364.519,-120.678
no net on FAB_DWG (solid): 83 vertices, not listed, extent 346.562,-125.262 351.467,-120.673
no net on FAB_DWG (solid): 74 vertices, not listed, extent 332.78,-126.496 340.172,-119.761
no net on FAB_DWG (solid): 89 vertices, not listed, extent 321.11,-123.525 327.529,-119.761
no net on FAB_DWG (solid): 1029 vertices, not listed, extent 280.89,-133.333 421.936,-119.759
no net on FAB_DWG (solid): -318.825,-75.62 -319.825,-71.62 -318.825,-72.12 -317.825,-71.62 -318.825,-75.62
no net on FAB_DWG (solid): -318.825,-24.62 -317.825,-28.62 -318.825,-28.12 -319.825,-28.62 -318.825,-24.62
no net on FAB_DWG (solid): -261.325,-75.12 ccw(c-261.825,-75.12) -261.825,-74.62 ccw(c-261.825,-75.12) -262.325,-75.12 ccw(c-261.825,-75.12) -261.825,-75.62 ccw(c-261.825,-75.12) -261.325,-75.12
no net on FAB_DWG (solid): -231.825,-67.12 -232.325,-68.62 -263.325,-68.62 -263.825,-67.12 -231.825,-67.12
no net on FAB_DWG (solid): -231.725,-53.62 -232.225,-55.12 -263.425,-55.12 -263.925,-53.62 -231.725,-53.62
no net on FAB_DWG (solid): -263.925,-46.62 -263.425,-45.12 -232.225,-45.12 -231.725,-46.62 -263.925,-46.62
no net on FAB_DWG (solid): -263.825,-33.12 -263.325,-31.62 -232.325,-31.62 -231.825,-33.12 -263.825,-33.12
no net on FAB_DWG (solid): -261.325,-25.12 ccw(c-261.825,-25.12) -261.825,-24.62 ccw(c-261.825,-25.12) -262.325,-25.12 ccw(c-261.825,-25.12) -261.825,-25.62 ccw(c-261.825,-25.12) -261.325,-25.12
no net on FAB_DWG (solid): -253.325,-75.12 ccw(c-253.825,-75.12) -253.825,-74.62 ccw(c-253.825,-75.12) -254.325,-75.12 ccw(c-253.825,-75.12) -253.825,-75.62 ccw(c-253.825,-75.12) -253.325,-75.12
no net on FAB_DWG (solid): -257.325,-75.12 ccw(c-257.825,-75.12) -257.825,-74.62 ccw(c-257.825,-75.12) -258.325,-75.12 ccw(c-257.825,-75.12) -257.825,-75.62 ccw(c-257.825,-75.12) -257.325,-75.12
no net on FAB_DWG (solid): -259.325,-75.12 ccw(c-259.825,-75.12) -259.825,-74.62 ccw(c-259.825,-75.12) -260.325,-75.12 ccw(c-259.825,-75.12) -259.825,-75.62 ccw(c-259.825,-75.12) -259.325,-75.12
no net on FAB_DWG (solid): -255.325,-75.12 ccw(c-255.825,-75.12) -255.825,-74.62 ccw(c-255.825,-75.12) -256.325,-75.12 ccw(c-255.825,-75.12) -255.825,-75.62 ccw(c-255.825,-75.12) -255.325,-75.12
no net on FAB_DWG (solid): -253.325,-25.12 ccw(c-253.825,-25.12) -253.825,-24.62 ccw(c-253.825,-25.12) -254.325,-25.12 ccw(c-253.825,-25.12) -253.825,-25.62 ccw(c-253.825,-25.12) -253.325,-25.12
no net on FAB_DWG (solid): -257.325,-25.12 ccw(c-257.825,-25.12) -257.825,-24.62 ccw(c-257.825,-25.12) -258.325,-25.12 ccw(c-257.825,-25.12) -257.825,-25.62 ccw(c-257.825,-25.12) -257.325,-25.12
no net on FAB_DWG (solid): -259.325,-25.12 ccw(c-259.825,-25.12) -259.825,-24.62 ccw(c-259.825,-25.12) -260.325,-25.12 ccw(c-259.825,-25.12) -259.825,-25.62 ccw(c-259.825,-25.12) -259.325,-25.12
no net on FAB_DWG (solid): -255.325,-25.12 ccw(c-255.825,-25.12) -255.825,-24.62 ccw(c-255.825,-25.12) -256.325,-25.12 ccw(c-255.825,-25.12) -255.825,-25.62 ccw(c-255.825,-25.12) -255.325,-25.12
no net on FAB_DWG (solid): -245.325,-75.12 ccw(c-245.825,-75.12) -245.825,-74.62 ccw(c-245.825,-75.12) -246.325,-75.12 ccw(c-245.825,-75.12) -245.825,-75.62 ccw(c-245.825,-75.12) -245.325,-75.12
no net on FAB_DWG (solid): -249.325,-75.12 ccw(c-249.825,-75.12) -249.825,-74.62 ccw(c-249.825,-75.12) -250.325,-75.12 ccw(c-249.825,-75.12) -249.825,-75.62 ccw(c-249.825,-75.12) -249.325,-75.12
no net on FAB_DWG (solid): -251.325,-75.12 ccw(c-251.825,-75.12) -251.825,-74.62 ccw(c-251.825,-75.12) -252.325,-75.12 ccw(c-251.825,-75.12) -251.825,-75.62 ccw(c-251.825,-75.12) -251.325,-75.12
no net on FAB_DWG (solid): -247.325,-75.12 ccw(c-247.825,-75.12) -247.825,-74.62 ccw(c-247.825,-75.12) -248.325,-75.12 ccw(c-247.825,-75.12) -247.825,-75.62 ccw(c-247.825,-75.12) -247.325,-75.12
no net on FAB_DWG (solid): -245.325,-25.12 ccw(c-245.825,-25.12) -245.825,-24.62 ccw(c-245.825,-25.12) -246.325,-25.12 ccw(c-245.825,-25.12) -245.825,-25.62 ccw(c-245.825,-25.12) -245.325,-25.12
no net on FAB_DWG (solid): -249.325,-25.12 ccw(c-249.825,-25.12) -249.825,-24.62 ccw(c-249.825,-25.12) -250.325,-25.12 ccw(c-249.825,-25.12) -249.825,-25.62 ccw(c-249.825,-25.12) -249.325,-25.12
no net on FAB_DWG (solid): -251.325,-25.12 ccw(c-251.825,-25.12) -251.825,-24.62 ccw(c-251.825,-25.12) -252.325,-25.12 ccw(c-251.825,-25.12) -251.825,-25.62 ccw(c-251.825,-25.12) -251.325,-25.12
no net on FAB_DWG (solid): -247.325,-25.12 ccw(c-247.825,-25.12) -247.825,-24.62 ccw(c-247.825,-25.12) -248.325,-25.12 ccw(c-247.825,-25.12) -247.825,-25.62 ccw(c-247.825,-25.12) -247.325,-25.12
no net on FAB_DWG (solid): -237.325,-75.12 ccw(c-237.825,-75.12) -237.825,-74.62 ccw(c-237.825,-75.12) -238.325,-75.12 ccw(c-237.825,-75.12) -237.825,-75.62 ccw(c-237.825,-75.12) -237.325,-75.12
no net on FAB_DWG (solid): -243.325,-75.12 ccw(c-243.825,-75.12) -243.825,-74.62 ccw(c-243.825,-75.12) -244.325,-75.12 ccw(c-243.825,-75.12) -243.825,-75.62 ccw(c-243.825,-75.12) -243.325,-75.12
no net on FAB_DWG (solid): -241.325,-75.12 ccw(c-241.825,-75.12) -241.825,-74.62 ccw(c-241.825,-75.12) -242.325,-75.12 ccw(c-241.825,-75.12) -241.825,-75.62 ccw(c-241.825,-75.12) -241.325,-75.12
no net on FAB_DWG (solid): -239.325,-75.12 ccw(c-239.825,-75.12) -239.825,-74.62 ccw(c-239.825,-75.12) -240.325,-75.12 ccw(c-239.825,-75.12) -239.825,-75.62 ccw(c-239.825,-75.12) -239.325,-75.12
no net on FAB_DWG (solid): -237.325,-25.12 ccw(c-237.825,-25.12) -237.825,-24.62 ccw(c-237.825,-25.12) -238.325,-25.12 ccw(c-237.825,-25.12) -237.825,-25.62 ccw(c-237.825,-25.12) -237.325,-25.12
no net on FAB_DWG (solid): -243.325,-25.12 ccw(c-243.825,-25.12) -243.825,-24.62 ccw(c-243.825,-25.12) -244.325,-25.12 ccw(c-243.825,-25.12) -243.825,-25.62 ccw(c-243.825,-25.12) -243.325,-25.12
no net on FAB_DWG (solid): -241.325,-25.12 ccw(c-241.825,-25.12) -241.825,-24.62 ccw(c-241.825,-25.12) -242.325,-25.12 ccw(c-241.825,-25.12) -241.825,-25.62 ccw(c-241.825,-25.12) -241.325,-25.12
no net on FAB_DWG (solid): -239.325,-25.12 ccw(c-239.825,-25.12) -239.825,-24.62 ccw(c-239.825,-25.12) -240.325,-25.12 ccw(c-239.825,-25.12) -239.825,-25.62 ccw(c-239.825,-25.12) -239.325,-25.12
no net on FAB_DWG (solid): -235.325,-75.12 ccw(c-235.825,-75.12) -235.825,-74.62 ccw(c-235.825,-75.12) -236.325,-75.12 ccw(c-235.825,-75.12) -235.825,-75.62 ccw(c-235.825,-75.12) -235.325,-75.12
no net on FAB_DWG (solid): -233.325,-75.12 ccw(c-233.825,-75.12) -233.825,-74.62 ccw(c-233.825,-75.12) -234.325,-75.12 ccw(c-233.825,-75.12) -233.825,-75.62 ccw(c-233.825,-75.12) -233.325,-75.12
no net on FAB_DWG (solid): -235.325,-25.12 ccw(c-235.825,-25.12) -235.825,-24.62 ccw(c-235.825,-25.12) -236.325,-25.12 ccw(c-235.825,-25.12) -235.825,-25.62 ccw(c-235.825,-25.12) -235.325,-25.12
no net on FAB_DWG (solid): -233.325,-25.12 ccw(c-233.825,-25.12) -233.825,-24.62 ccw(c-233.825,-25.12) -234.325,-25.12 ccw(c-233.825,-25.12) -233.825,-25.62 ccw(c-233.825,-25.12) -233.325,-25.12
no net on ASY_DWG (solid): 82 vertices, not listed, extent 358.174,-123.906 364.519,-120.678
no net on ASY_DWG (solid): 83 vertices, not listed, extent 346.562,-125.262 351.467,-120.673
no net on ASY_DWG (solid): 74 vertices, not listed, extent 332.78,-126.496 340.172,-119.761
no net on ASY_DWG (solid): 89 vertices, not listed, extent 321.11,-123.525 327.529,-119.761
no net on ASY_DWG (solid): 1029 vertices, not listed, extent 280.89,-133.333 421.936,-119.759
no net on ASY_DWG_R (solid): 82 vertices, not listed, extent -291.647,-123.906 -285.302,-120.678
no net on ASY_DWG_R (solid): 83 vertices, not listed, extent -278.594,-125.262 -273.689,-120.673
no net on ASY_DWG_R (solid): 74 vertices, not listed, extent -267.3,-126.496 -259.907,-119.761
no net on ASY_DWG_R (solid): 89 vertices, not listed, extent -254.657,-123.525 -248.237,-119.761
no net on ASY_DWG_R (solid): 1029 vertices, not listed, extent -349.064,-133.333 -208.018,-119.759
no net on TITLEBLOCK (solid): 26 vertices, not listed, extent 4.986,-101.233 7.686,-99.933
no net on TITLEBLOCK (solid): 0.146,-101.833 1.136,-100.033 2.036,-101.833 0.146,-101.833
no net on TITLEBLOCK (solid): -10.339,-99.933 -9.216,-101.142 -8.137,-99.933 -10.339,-99.933
no net on TITLEBLOCK (solid): -5.152,-99.933 -2.614,-102.251 -2.614,-99.933 -5.152,-99.933